# EAGLE board ch340_usb (EAGLE 9.6.2)
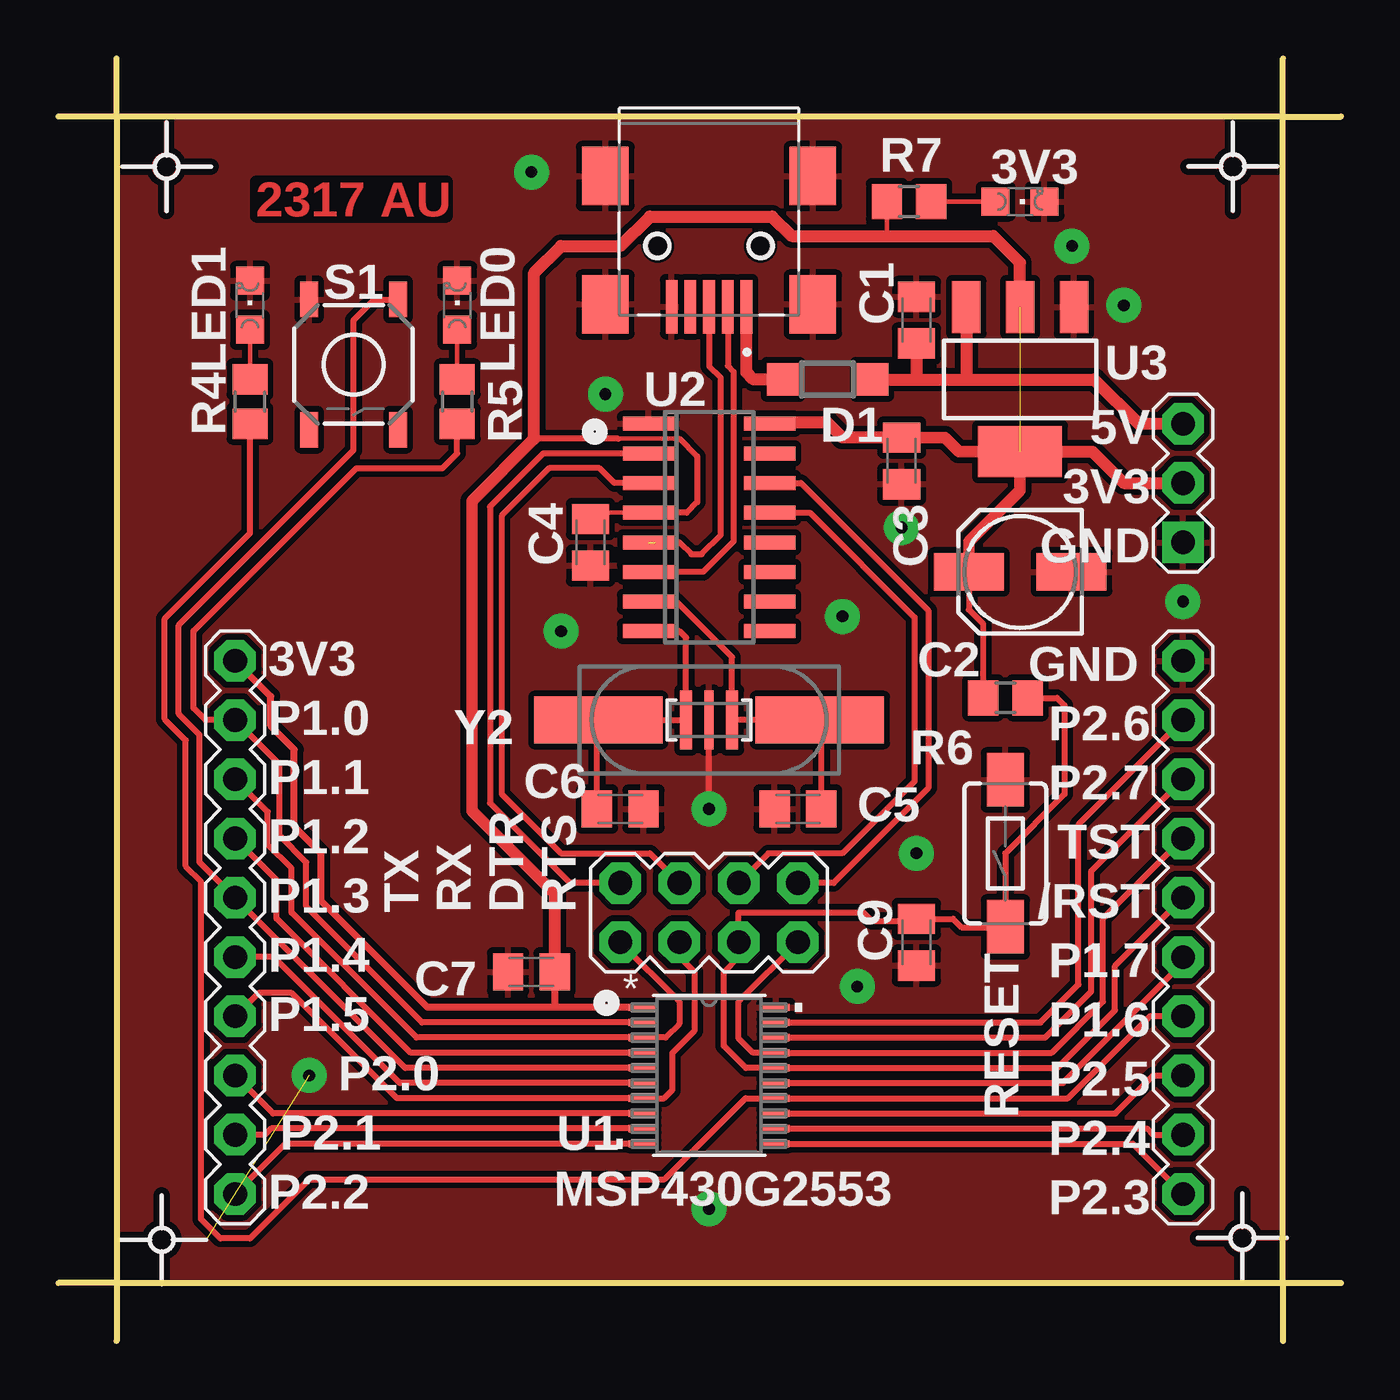
[diagram p0: board, top side]
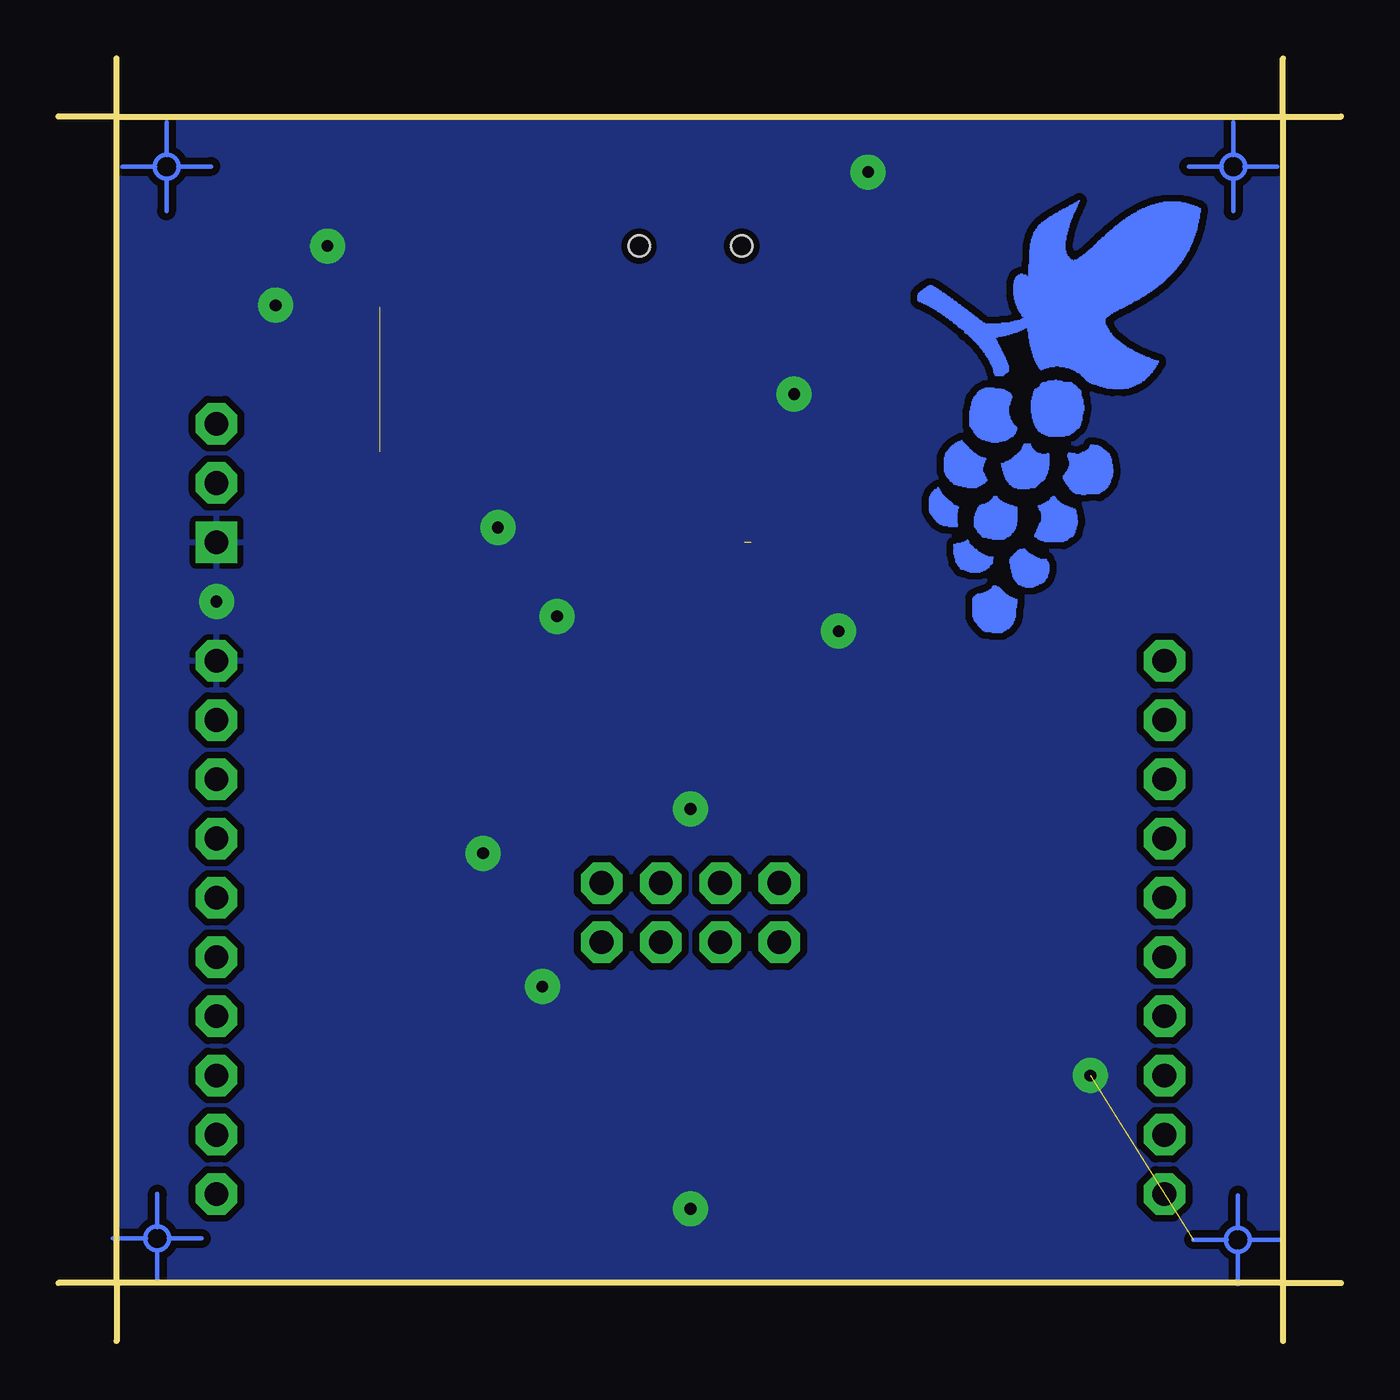
[diagram p1: board, bottom side, seen from below]

Size 55 x 55 mm. Coordinates in mm from the lower left corner, seen from the top.
Outline: 2.5,2.5 52.5,2.5
Outline: 52.5,2.5 52.5,52.5
Outline: 52.5,52.5 2.5,52.5
Outline: 2.5,52.5 2.5,2.5
Outline: 2.5,52.5 0,52.5
Outline: 2.5,52.5 2.5,55
Outline: 52.5,52.5 55,52.5
Outline: 52.5,52.5 52.5,55
Outline: 2.5,2.5 0,2.5
Outline: 2.5,2.5 2.5,0
Outline: 52.5,2.5 55,2.5
Outline: 52.5,2.5 52.5,0
Copper layers (1*16): Top 0.035mm / dielectric 1.5mm / Bottom 0.035mm
Design rules "default *": minimum track width 0.2mm, minimum drill 0.35mm, track to track 6mil, track to pad 6mil, pad to pad 6mil, via to via 6mil, smd to smd 6mil, copper to edge 0mil, drill to drill 6mil, minimum pad ring 10mil, minimum via ring 8mil, stop-mask expansion 4mil, vias tented up to drill 0mil, thermal gap 10mil

## Footprints (pad centres in the part's own frame; a part is rotated, then mirrored left to right if it is on the bottom)
CHIPLED_0805 = smd 1.2 x 1.2: A 0,-1.05; C 0,1.05
C0805K = smd 1.3 x 1.6: 1 -1,0; 2 1,0
153CLV-0505 = smd 3 x 1.6: + 2.2,0; - -2.2,0
SOD123 = smd 1.4 x 1.4: A 1.9,0; C -1.9,0
1734035-4 = smd 0.5 x 2.3: 1 -1.6,2.6; 2 -0.8,2.6; 3 0,2.6; 4 0.8,2.6; 5 1.6,2.6 | smd 2 x 2.5: S1 -4.45,2.5; S2 4.45,2.5; S3 -4.45,-3; S4 4.45,-3 | hole 0.9: -2.2,0; 2.2,0
R0805 = smd 1.3 x 1.5: 1 -0.95,0; 2 0.95,0
TACTILE_SWITCH_SMD_6.0X3.5MM = smd 2.3 x 1.6: 1 -3.15,0; 2 3.15,0
TACTILE_SWITCH_SMD_5.2MM = smd 1.524 x 0.762: 1 -2.794,1.905; 2 2.794,1.905; 3 -2.794,-1.905; 4 2.794,-1.905
MA04-2 = drill 1.016 pad 1.778 octagon: 1 -3.81,-1.27; 2 -3.81,1.27; 3 -1.27,-1.27; 4 -1.27,1.27; 5 1.27,-1.27; 6 1.27,1.27; 7 3.81,-1.27; 8 3.81,1.27
MA10-1 = drill 1.016 pad 1.778 octagon: 1 -11.43,0; 2 -8.89,0; 3 -6.35,0; 4 -3.81,0; 5 -1.27,0; 6 1.27,0; 7 3.81,0; 8 6.35,0; 9 8.89,0; 10 11.43,0
MA03-1 = drill 1.016 pad 1.778 square: 1 -2.54,0 | drill 1.016 pad 1.778 octagon: 2 0,0; 3 2.54,0
PW20-L = smd 1.168 x 0.305: 1 -2.87,2.925; 2 -2.87,2.275; 3 -2.87,1.625; 4 -2.87,0.975; 5 -2.87,0.325; 6 -2.87,-0.325; 7 -2.87,-0.975; 8 -2.87,-1.625; 9 -2.87,-2.275; 10 -2.87,-2.925; 11 2.87,-2.925; 12 2.87,-2.275; 13 2.87,-1.625; 14 2.87,-0.975; 15 2.87,-0.325; 16 2.87,0.325; 17 2.87,0.975; 18 2.87,1.625; 19 2.87,2.275; 20 2.87,2.925
SOIC16N = smd 0.6 x 2.2: 1 -4.445,-2.6; 2 -3.175,-2.6; 3 -1.905,-2.6; 4 -0.635,-2.6; 5 0.635,-2.6; 6 1.905,-2.6; 7 3.175,-2.6; 8 4.445,-2.6; 9 4.445,2.6; 10 3.175,2.6; 11 1.905,2.6; 12 0.635,2.6; 13 -0.635,2.6; 14 -1.905,2.6; 15 -3.175,2.6; 16 -4.445,2.6
SOT223 = smd 1.219 x 2.235: 1 -2.311,-3.099; 2 0,-3.099; 3 2.311,-3.099 | smd 3.6 x 2.2: 4 0,3.099
CSTCE_V_MUR = smd 0.508 x 2.54: 1 -0.988,0; 3 0.988,0 | smd 0.381 x 2.54: 2 0,0
CSM-7X-DU = smd 5.5 x 2: 1 -4.75,0; 2 4.75,0

## Placement (x,y rotation side)
3V3  PWR  [CHIPLED_0805]  41.23,48.85 270 top
C1  10u  [C0805K]  36.79,43.77 90 top
C2  10u  [153CLV-0505]  41.23,32.98 180 top
C3  100n  [C0805K]  36.16,37.74 270 top
C4  10n  [C0805K]  22.82,34.25 270 top
C5  22p  [C0805K]  31.71,22.82 180 top
C6  22p  [C0805K]  24.09,22.82 0 top
C7  100n  [C0805K]  20.28,15.84 180 top
C9  100n  [C0805K]  36.79,17.11 270 top
D1  BAT60B  [SOD123]  32.98,41.23 180 top
J1  1734035-4  [1734035-4]  27.9,46.95 180 top
LED0  PWR  [CHIPLED_0805]  17.11,44.41 0 top
LED1  PWR  [CHIPLED_0805]  8.21,44.41 0 top
R4  3k3  [R0805]  8.21,40.28 270 top
R5  3k3  [R0805]  17.11,40.28 270 top
R6  10k  [R0805]  40.6,27.58 0 top
R7  1k  [R0805]  36.47,48.85 0 top
RESET  MOMENTARY-SWITCH-SPST-SMD-6.0X3.5MM  [TACTILE_SWITCH_SMD_6.0X3.5MM]  40.6,20.91 90 top
S1  MOMENTARY-SWITCH-SPST-SMD-5.2MM  [TACTILE_SWITCH_SMD_5.2MM]  12.66,41.87 270 top
SV1  [MA04-2]  27.9,18.38 0 top
SV2  [MA10-1]  7.58,17.74 90 top
SV3  [MA10-1]  48.22,17.74 90 top
SV4  [MA03-1]  48.22,36.79 90 top
U1  MSP430G2553  [PW20-L]  27.9,11.39 0 top
U2  [SOIC16N]  27.9,34.88 270 top
U3  AMS1117  [SOT223]  41.23,41.23 180 top
Y1  CSTCE16M0V53-R0  [CSTCE_V_MUR]  27.9,26.63 180 top
Y2  CSM-7X-DU  [CSM-7X-DU]  27.9,26.63 180 top

## Library data of the parts
3V3 LED0 LED1 = led
C1-C7 C9 = rcl; SPICEPREFIX: C
D1 = diode
J1 = USB connector; CREATED_BY: PCBLayout.com; DIGIKEY_PARTNO: A121554TR-ND; MANUFACTURER: TE Connectivity AMP Connectors; MPN: 1734035-4
R4-R7 = rcl; SPICEPREFIX: R
RESET = SparkFun-Switches; PROD_ID: SWCH-14278; SF_SKU: COM-08229
S1 = SparkFun-Switches; PROD_ID: SWCH-08247; SF_SKU: COM-08720
SV1-SV4 = con-lstb_round_pads; OC_FARNELL: unknown; OC_NEWARK: unknown
U1 = msp430g2553_tssop20; COPYRIGHT: Copyright (C) 2023 Ultra Librarian. All rights reserved.; MANUFACTURER_PART_NUMBER: MSP430G2553IPW20R; MFR_NAME: Texas Instruments; NAMENAME: U1
U2 = ch340
U3 = SparkFun-IC-Power; PROD_ID: VREG-08170
Y1 = cstce16mov53-r0; COPYRIGHT: Copyright (C) 2023 Ultra Librarian. All rights reserved.; MANUFACTURER_PART_NUMBER: CSTCE16M0V53-R0; MFR_NAME: Murata
Y2 = crystal; OC_FARNELL: unknown; OC_NEWARK: unknown

## Nets
3V3: C2.+ C3.1 C4.1 C7.1 R6.1 R7.1 SV2.10 SV4.2 U1.1 U2.4 U2.16 U3.2 U3.4
/RST: C9.1 R6.2 RESET.1 SV1.5 SV3.6 U1.16
CTS: U2.9
D_N: J1.2 U2.6
D_P: J1.3 U2.5
DCD: U2.12
DSR: U2.10
DTR: SV1.6 U2.13
GND: 3V3.C C1.2 C2.- C3.2 C4.2 C5.2 C6.2 C7.2 C9.2 J1.5 J1.S1 J1.S2 J1.S3 J1.S4 LED0.C LED1.C RESET.2 S1.3 SV3.10 SV4.1 U1.20 U2.1 U3.1 Y1.2
N$3: LED1.A R4.1
N$4: LED0.A R5.1
N$6: 3V3.A R7.2
P1.0: R5.2 SV2.9 U1.2
P1.1_RX: SV1.1 SV2.8 U1.3
P1.2: SV2.7 U1.4
P1.3: S1.1 SV2.6 U1.5
P1.4: SV2.5 U1.6
P1.5_TX: SV1.3 SV2.4 U1.7
P1.6: R4.2 SV3.4 U1.14
P1.7: SV3.5 U1.15
P2.0: SV2.3 U1.8
P2.1: SV2.2 U1.9
P2.2: SV2.1 U1.10
P2.3: SV3.1 U1.11
P2.4: SV3.2 U1.12
P2.5: SV3.3 U1.13
P2.6_XI: SV3.9 U1.19
P2.7_XO: SV3.8 U1.18
RI: U2.11
RS232: U2.15
RTS: SV1.8 U2.14
RX: SV1.4 U2.3
TEST: SV1.7 SV3.7 U1.17
TX: SV1.2 U2.2
USB_5V: C1.1 D1.C SV4.3 U3.3
VBUS: D1.A J1.1
XI: C5.1 U2.7 Y1.1 Y2.1
XO: C6.1 U2.8 Y1.3 Y2.2

## Tracks (layer width: path | path; a pad name or v marks a point on that pad's centre or on a via)
3V3  (1 unrouted)
  Top 0.2: 26.63,38.7 24,38.7
  Top 0.203: R7.1 35.52,47.38 | C4.1 23.09,35.52 U2.4 25.36,35.52
  Top 0.25: 26.63,38.7 27.39,37.93 27.39,35.97 26.95,35.52 25.36,35.52 | R6.1 39.65,30.76 39.03,31.37 C2.+ | 24,38.7 20.41,38.7
  Top 0.3: C7.1 21.28,14.33 21.3,14.31 | 11.26,20.91 10.12,22.06 10.12,25.36 9.1,26.38 9.1,27.65
  Top 0.305: U1.1 21.3,14.31 15.83,14.31 11.26,18.88 11.26,20.91 | 9.1,27.65 SV2.10
  Top 0.5: C3.1 38.01,38.74 38.62,38.14 U3.4 41.23,36.47 39.03,34.27 C2.+ | 20.41,38.7 17.74,36.03 17.74,22.74 21.28,19.2
  Top 0.508: U3.4 44.33,38.14 45.68,36.79 SV4.2 | C3.1 33.61,38.74 32.98,39.38 30.55,39.38 U2.16 | 21.28,19.2 C7.1 | U3.2 41.23,46.23 40.09,47.38 35.52,47.38 31.45,47.38 30.61,48.22 25.36,48.22 24.09,46.95 21.55,46.95 20.41,45.81 20.41,38.7
/RST
  Top 0.203: RESET.1 40.6,17.74
  Top 0.25: R6.2 42.82,27.58 43.14,27.26 43.14,23.46 40.6,20.92 40.6,17.74 38.72,17.74 38.35,18.11 C9.1 36.7,18.01 34.88,18.01 34.52,18.38 29.17,18.38 SV1.5 29.17,16.47 28.54,15.84 28.54,12.66 29.48,11.71 U1.16 42.83,11.71 45.3,14.18 45.3,16.09 SV3.6
D_N
  Top 0.203: 25.36,32.98 U2.6
  Top 0.25: J1.2 28.7,41.81 28.95,41.56 28.95,34.29 27.65,32.98 25.36,32.98
D_P  (1 unrouted)
  Top 0.25: J1.3 27.9,41.81 28.41,41.3 28.41,34.56 27.59,33.74 27.14,33.74 26.63,34.25 25.59,34.25
DTR
  Top 0.25: U2.13 32.22,35.52 36.71,31.03 36.71,24.01 33.61,20.91 30.44,20.91 SV1.6
GND  (via drill 0.5 pad 1.5)  (1 unrouted)
  Top 0.203: 4.91,4.35 6.33,4.35
  Top 0.25: v27.9,22.82 Y1.2
  other vias: 43.46,46.95 45.68,44.41 23.45,40.6 21.55,30.44 20.28,50.12 34.25,15.2 48.22,31.71 36.79,20.91 33.61,31.07 36.16,34.88 10.76,11.39 27.9,5.67
  pour Top (isolate 0.254): 2.5,52.28 52.41,52.28 52.41,2.5 2.5,2.5
  pour Bottom (isolate 0.305): 2.5,52.26 2.5,2.5 52.41,2.5 52.41,52.26
N$3
  Top 0.203: R4.1 LED1.A
N$4
  Top 0.203: R5.1 LED0.A
N$6
  Top 0.203: R7.2 3V3.A
N$8
  Top 0.203: 4.15,50.35 2.73,50.35
N$9
  Top 0.203: 4.63,50.84 4.63,52.26
N$10
  Top 0.203: 4.63,49.85 4.63,48.45
N$11
  Top 0.203: 5.12,50.35 6.54,50.35
N$12
  Top 0.203: 49.87,50.35 48.45,50.35
N$13
  Top 0.203: 50.35,50.84 50.35,52.26
N$14
  Top 0.203: 50.35,49.85 50.35,48.45
N$15
  Top 0.203: 50.84,50.35 52.26,50.35
N$16
  Top 0.203: 3.95,4.35 2.52,4.35
N$17
  Top 0.203: 4.43,4.84 4.43,6.26
N$18
  Top 0.203: 4.43,3.85 4.43,2.45
N$20
  Top 0.203: 50.28,4.41 48.85,4.41
N$21
  Top 0.203: 50.76,4.89 50.76,6.31
N$22
  Top 0.203: 50.76,3.9 50.76,2.5
N$23
  Top 0.203: 51.24,4.41 52.66,4.41
N$24
  Bottom 0.203: 4.15,50.35 2.73,50.35
N$25
  Bottom 0.203: 4.63,50.84 4.63,52.26
N$26
  Bottom 0.203: 4.63,49.85 4.63,48.45
N$27
  Bottom 0.203: 5.12,50.35 6.54,50.35
N$28
  Bottom 0.203: 49.87,50.35 48.45,50.35
N$29
  Bottom 0.203: 50.35,50.84 50.35,52.26
N$30
  Bottom 0.203: 50.35,49.85 50.35,48.45
N$31
  Bottom 0.203: 50.84,50.35 52.26,50.35
N$32
  Bottom 0.203: 50.28,4.41 48.85,4.41
N$33
  Bottom 0.203: 50.76,4.89 50.76,6.31
N$34
  Bottom 0.203: 50.76,3.9 50.76,2.5
N$35
  Bottom 0.203: 51.24,4.41 52.66,4.41
N$36
  Bottom 0.203: 3.95,4.35 2.52,4.35
N$37
  Bottom 0.203: 4.43,4.84 4.43,6.26
N$38
  Bottom 0.203: 4.43,3.85 4.43,2.45
N$39
  Bottom 0.203: 4.91,4.35 6.33,4.35
P1.0
  Top 0.25: R5.2 17.11,38.06 16.47,37.42 12.78,37.42 5.8,30.45 5.8,27.14 6.31,26.63 SV2.9 9.48,24.73 9.48,21.68 10.63,20.53 10.63,18.63 15.59,13.66 U1.2
P1.1_RX
  Top 0.25: SV1.1 26.63,14.56 26.63,13.61 26.03,13.02 U1.3 15.35,13.02 9.99,18.38 9.99,20.28 8.98,21.3 8.98,22.69 SV2.8
P1.2
  Top 0.25: U1.4 15.11,12.37 9.36,18.12 9.36,19.77 SV2.7
P1.3
  Top 0.25: S1.1 13.55,44.66 12.66,43.77 12.66,38.2 5.17,30.7 5.17,26.88 6.06,26 6.06,20.53 SV2.6 14.88,11.71 U1.5
P1.4
  Top 0.25: U1.6 14.64,11.06 9.23,16.47 SV2.5
P1.5_TX
  Top 0.25: SV1.3 26.63,16.47 27.27,15.84 27.27,13.29 26.31,12.34 26.31,10.76 25.97,10.41 U1.7 14.52,10.41 10.01,14.93 8.58,14.93 SV2.4
P1.6
  Top 0.25: SV3.4 46.81,13.93 43.29,10.41 U1.14 29.46,10.41 26,6.95 10.76,6.95 8.21,4.41 6.95,4.41 6.12,5.23 6.12,19.71 5.47,20.36 5.47,25.76 4.56,26.66 4.56,30.99 8.21,34.64 R4.2
P1.7
  Top 0.25: U1.15 43.07,11.06 48.22,16.22 SV3.5
P2.0
  Top 0.25: U1.8 9.21,9.77 SV2.3
P2.1
  Top 0.25: U1.9 9.12,9.12 8.85,8.85 SV2.2
P2.2
  Top 0.25: U1.10 9.73,8.46 9.48,8.21 SV2.1
P2.3
  Top 0.25: U1.11 46.06,8.46 SV3.1
P2.4
  Top 0.25: U1.12 46.69,9.12 46.95,8.85 SV3.2
P2.5
  Top 0.25: U1.13 45.33,9.77 46.95,11.39 SV3.3
P2.6_XI
  Top 0.25: U1.19 42.11,13.66 43.74,15.29 43.74,22.15 SV3.9
P2.7_XO
  Top 0.25: U1.18 42.31,13.02 44.28,14.99 44.28,20.15 SV3.8
RTS
  Top 0.25: U2.14 31.84,36.79 37.3,31.33 37.3,23.71 33.23,19.64 SV1.8
RX
  Top 0.25: U2.3 23.84,36.79 23.2,37.42 21.04,37.42 19.01,35.4 19.01,23.45 21.55,20.91 25.36,20.91 SV1.4
TEST
  Top 0.25: SV1.7 29.17,14.56 29.17,12.98 29.78,12.37 U1.17 42.59,12.37 44.79,14.56 44.79,18.12 SV3.7
TX
  Top 0.25: U2.2 23.45,38.06 | 23.45,38.06 20.79,38.06 18.5,35.77 18.5,23.07 21.93,19.64 SV1.2 | 23.45,38.06
USB_5V
  Top 0.508: SV4.3 46.31,39.33 44.41,41.23 39.01,41.23 | D1.C 36.79,41.23 | 36.79,41.23 39.01,41.23 | U3.3 38.92,41.32 39.01,41.23 | C1.1 36.79,41.23
VBUS
  Top 0.508: D1.A 29.8,41.23 29.5,41.54 J1.1
XI
  Top 0.25: U2.7 26.5,31.71 28.89,29.32 Y1.1 Y2.1 32.71,26.57 C5.1
XO
  Top 0.25: U2.8 26.63,30.44 26.91,30.16 Y1.3 Y2.2 23.09,26.57 C6.1
(copper drawn outside any net)
  shapes: Bottom area x955, Bottom circle x4, Top circle x4

## Text on the board
Top: 2317 AU
tNames: 5V | 3V3 | GND | GND | 3V3 | P2.6 | P1.0 | P2.7 | P1.1 | TST | P1.2 | /RST | P1.3 | TX / RX / DTR / RTS | P1.7 | P1.4 | P1.6 | P1.5 | P2.5 | P2.0 | P2.4 | P2.1 | U1 | P2.3 | P2.2